# Altium PCB 0021.PcbDoc
Units mm, origin at the board's own origin, x right, y up, seen from the top; angles counter-clockwise.
Board outline 152.4 x 101.6 mm, 2 copper layers (Top Layer, Bottom Layer); 9 components, 8 nets, 19 pads, 18 vias.
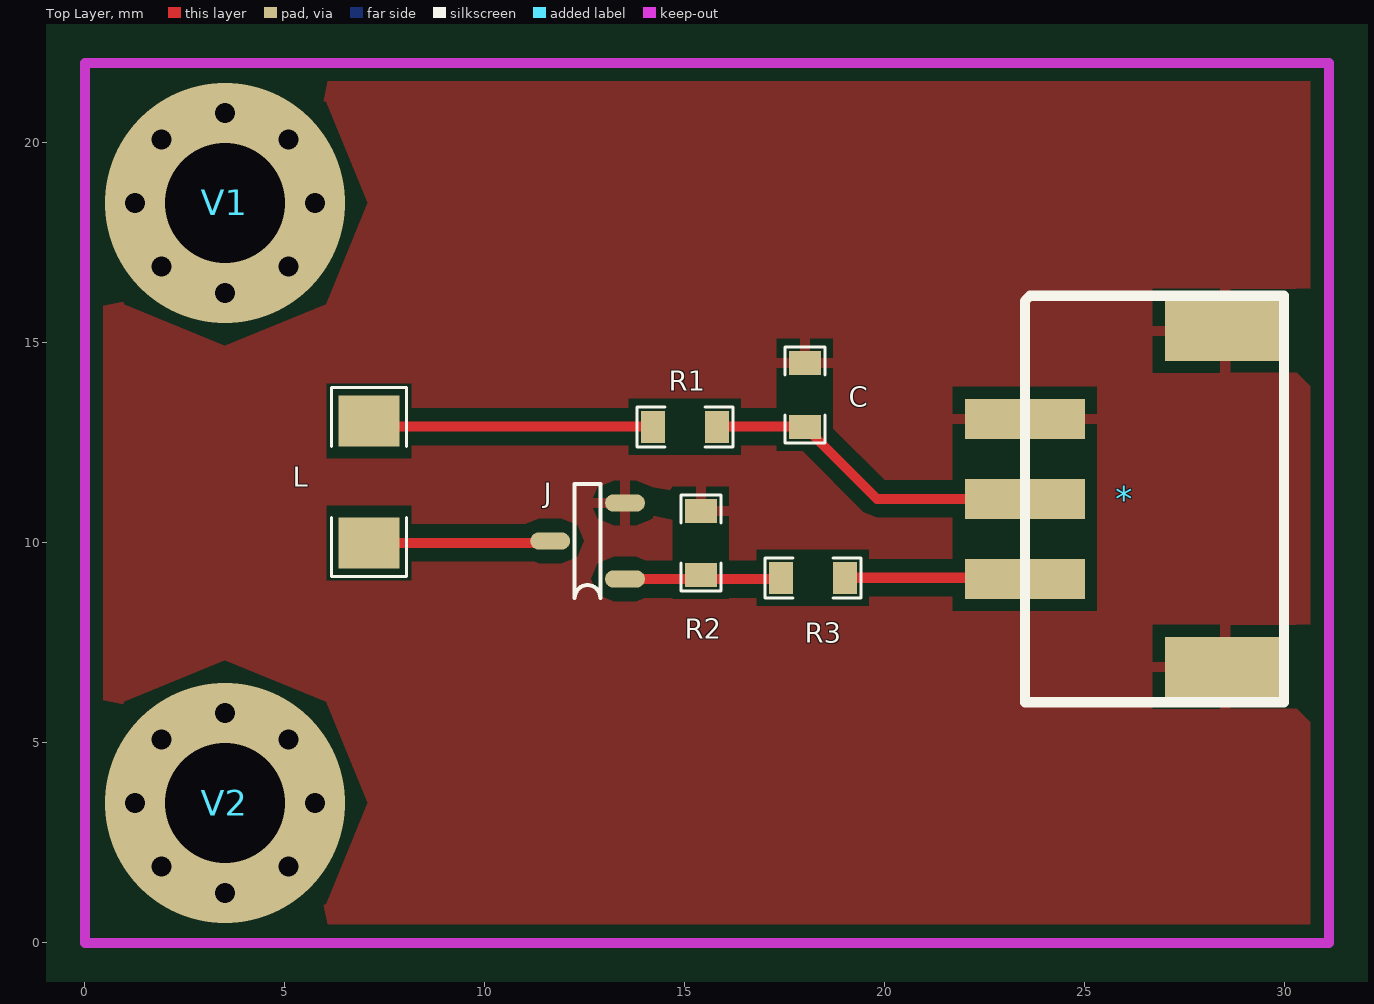
[diagram p0: Top Layer view]
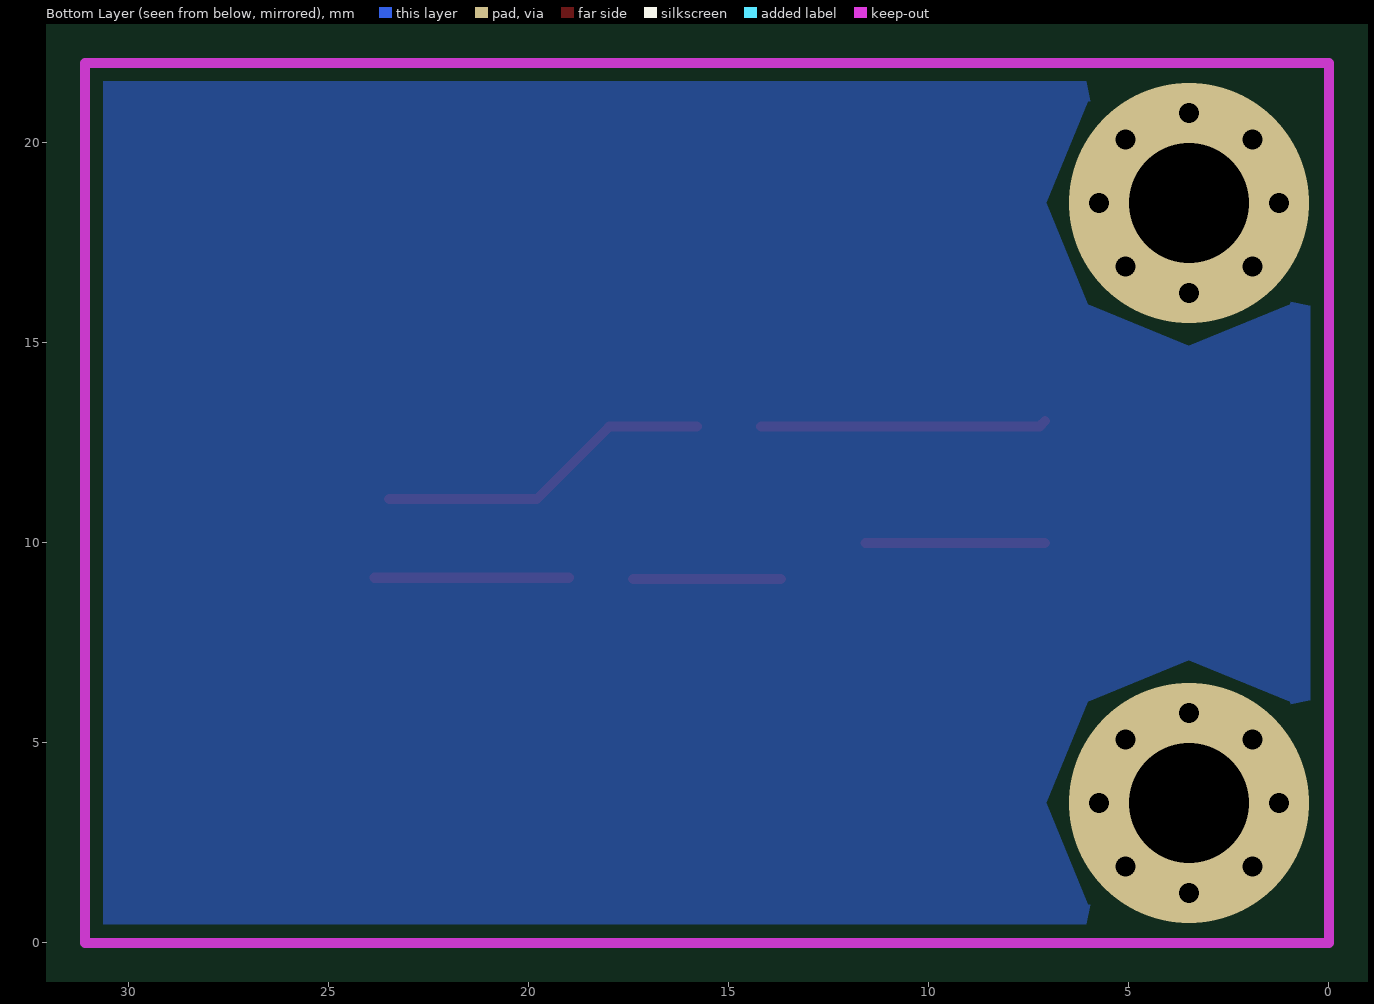
[diagram p1: Bottom Layer view, seen from below]

## Layer stack, top to bottom
Top Layer: signal copper 0.0356
Dielectric: dielectric 0.32, FR-4, Dk 4.8
Bottom Layer: signal copper 0.0356

## Board outline
-67.945,-46.863 84.455,-46.863 84.455,54.737 -67.945,54.737

## Design rules (kind name [scope] priority, off if disabled: settings)
Clearance [All] p1: gap=0.3
PolygonConnect [All] p1: connectstyle=Relief reliefconductorwidth=0.254 reliefentries=4 polygonreliefangle="90 Angle"
RoutingVias [All] p1: holewidth=0.711 width=1.27 viastyle="Through Hole" minholewidth=0.711 minwidth=1.27 maxholewidth=0.711 maxwidth=1.27
SilkscreenOverComponentPads [All] p1: minsilkscreentomaskgap=0.254
SolderMaskExpansion [All] p1: expansion=0.102
Width [All] p1: maxlimit=0.254 minlimit=0.254 preferedwidth=0.254
27 further rules are at their usual default settings.

## Classes and differential pairs
component class 0021: * J L V1 V2

## Components (designator, comment, footprint, x,y, rotation, side; value= is the part's Value field where it differs from the comment)
* "sh-2.0" sh-2.0 23.5,11.1 r90 top
C "Comment" 0603E 18,14.4 r270 top
J "s8050" SOT-23 13.5,9.1 r180 top
L "LED" 1206 7.1,10 r90 top
R1 "Comment" 0603E 14.3,12.9 r0 top
R2 "Comment" 0603E 15.4,10.7 r270 top
R3 "Comment" 0603E 18.9,9.13 r180 top
V1 "Via" Via 3.5,18.5 r0 top
V2 "Via" Via 3.5,3.5 r0 top

## Footprints (in the part's own frame and the unit in brackets; to place one, negate y for a bottom-side part, rotate by r counter-clockwise, add the part's x,y. Pads: shape width x height; smd on the part's side, far side on the other; paste and mask are expansions set on the pad)
0603E [mm]
  rect 0.6x0.8 smd: 1(-0.1,0) 2(1.5,0)
  silkscreen extent -0.5,-0.5 1.9,0.5
1206 [mil]
  rect 50x60 smd: 1(0,0) 2(120,0)
  silkscreen extent -33,-37 153,37
sh-2.0 [mm]
  rect 1x3 smd: 1(-2,0) 2(0,0) 3(2,0) 3(2,0)
  rect 1.5x3 smd: GND(-4.2,-5) GND(4.2,-5)
  silkscreen extent -5.08,-6.48 5.08,0
SOT-23 [mm]
  oval 1x0.43 smd: 1(0,0) 2(0,-1.9) 3(1.87,-0.95)
  silkscreen extent 0.61,-2.38 1.26,0.48
Via [mm]

## Part data
L: library part RES1206

## Via types
v1: diameter 1, hole 0.5, Top Layer to Bottom Layer, 16 vias
v2: diameter 6, hole 3, Top Layer to Bottom Layer, 2 vias

## Nets (pads, with @x,y where several pads share a name; then routed paths per layer and width w, separated by ;. In a path a pad name is that pad's centre, name@x,y a point inside that pad or via, vN(x,y) a via of type N, cw(c..) or ccw(c..) an arc to the next point about the centre after c; other vN are vias at no path point)
GND: *.3 *.GND C.1 J.2 R2.1
Net*_1: *.1 R3.1 | length 4.9
  Top Layer w0.254: R3.1 *.1@23.856,9.13
Net*_2: 
NetC_1: *.2 C.2 R1.2 | length 8.4
  Top Layer w0.254: R1.2@15.8,12.908 C.2@17.992,12.908 ; C.2 19.8,11.1 *.2
NetJ_1: J.1 R2.2 R3.2 | length 3.7
  Top Layer w0.254: J.1@13.696,9.098 R3.2@17.4,9.098
NetJ_2: 
NetJ_3: J.3 L.1 | length 4.5
  Top Layer w0.254: L.1 J.3@11.58,10
NetL_2: L.2 R1.1 | length 7.2
  Top Layer w0.254: L.2 7.24,12.908 R1.1@14.2,12.908
copper on no net:
  other v1: 3.5,1.25 1.909,1.909 5.091,1.909 1.25,3.5 5.75,3.5 1.909,5.091 5.091,5.091 3.5,5.75 3.5,16.25 1.909,16.909 5.091,16.909 1.25,18.5 5.75,18.5 1.909,20.091 5.091,20.091 3.5,20.75
  other v2: 3.5,3.5 3.5,18.5

## Polygon pours and split planes (outlines as drawn)
GND on Bottom Layer "Top Layer-No Net" (solid, pour order 18): 0,22 0,0 31.1,0 31.1,22
GND on Top Layer "Top Layer-No Net" (solid, pour order 4): 0,22 31.1,22 31.1,0 0,0

## Keep-outs
Keep-Out Layer:
  lines w0.254: 0,0 31.1,0 31.1,22 0,22 0,0

## Silkscreen, mask and mechanical layers (free items; w line width, h text height)
Top Solder:
  text "Digital Red Led" at 9.144,3.937 h1.52
  text "Module V2" at 12.827,0.889 h1.52